# Altium PCB LPCB227R0.PcbDoc
Units mm, origin at the board's own origin, x right, y up, seen from the top; angles counter-clockwise.
Board outline 82 x 78 mm, 4 copper layers (Top Layer, Internal Plane 1, Mid-Layer 1, Bottom Layer); 47 components, 24 nets, 144 pads, 95 vias.
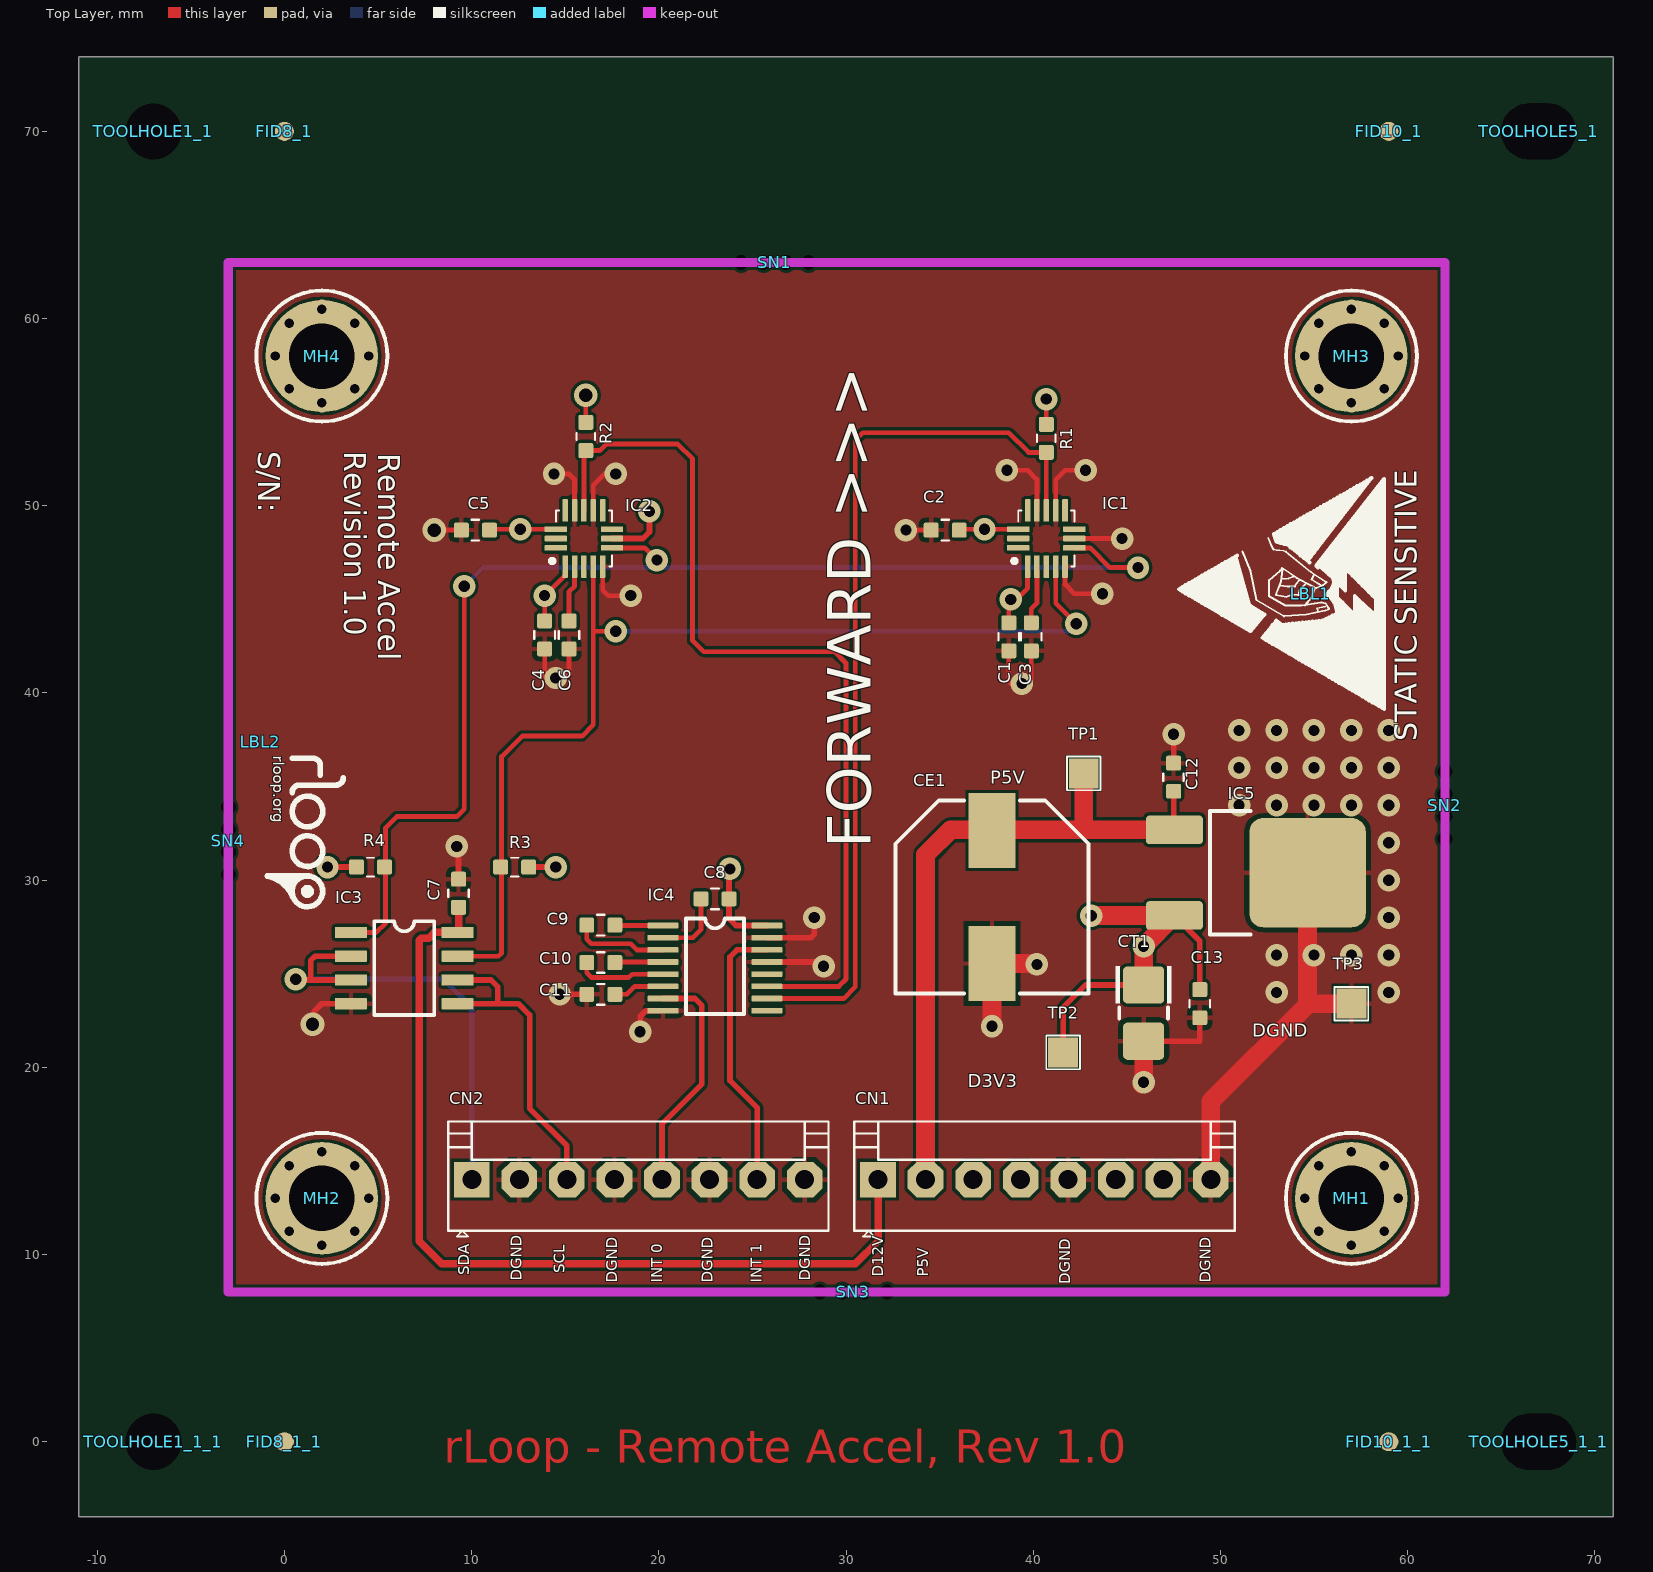
[diagram p0: Top Layer view]
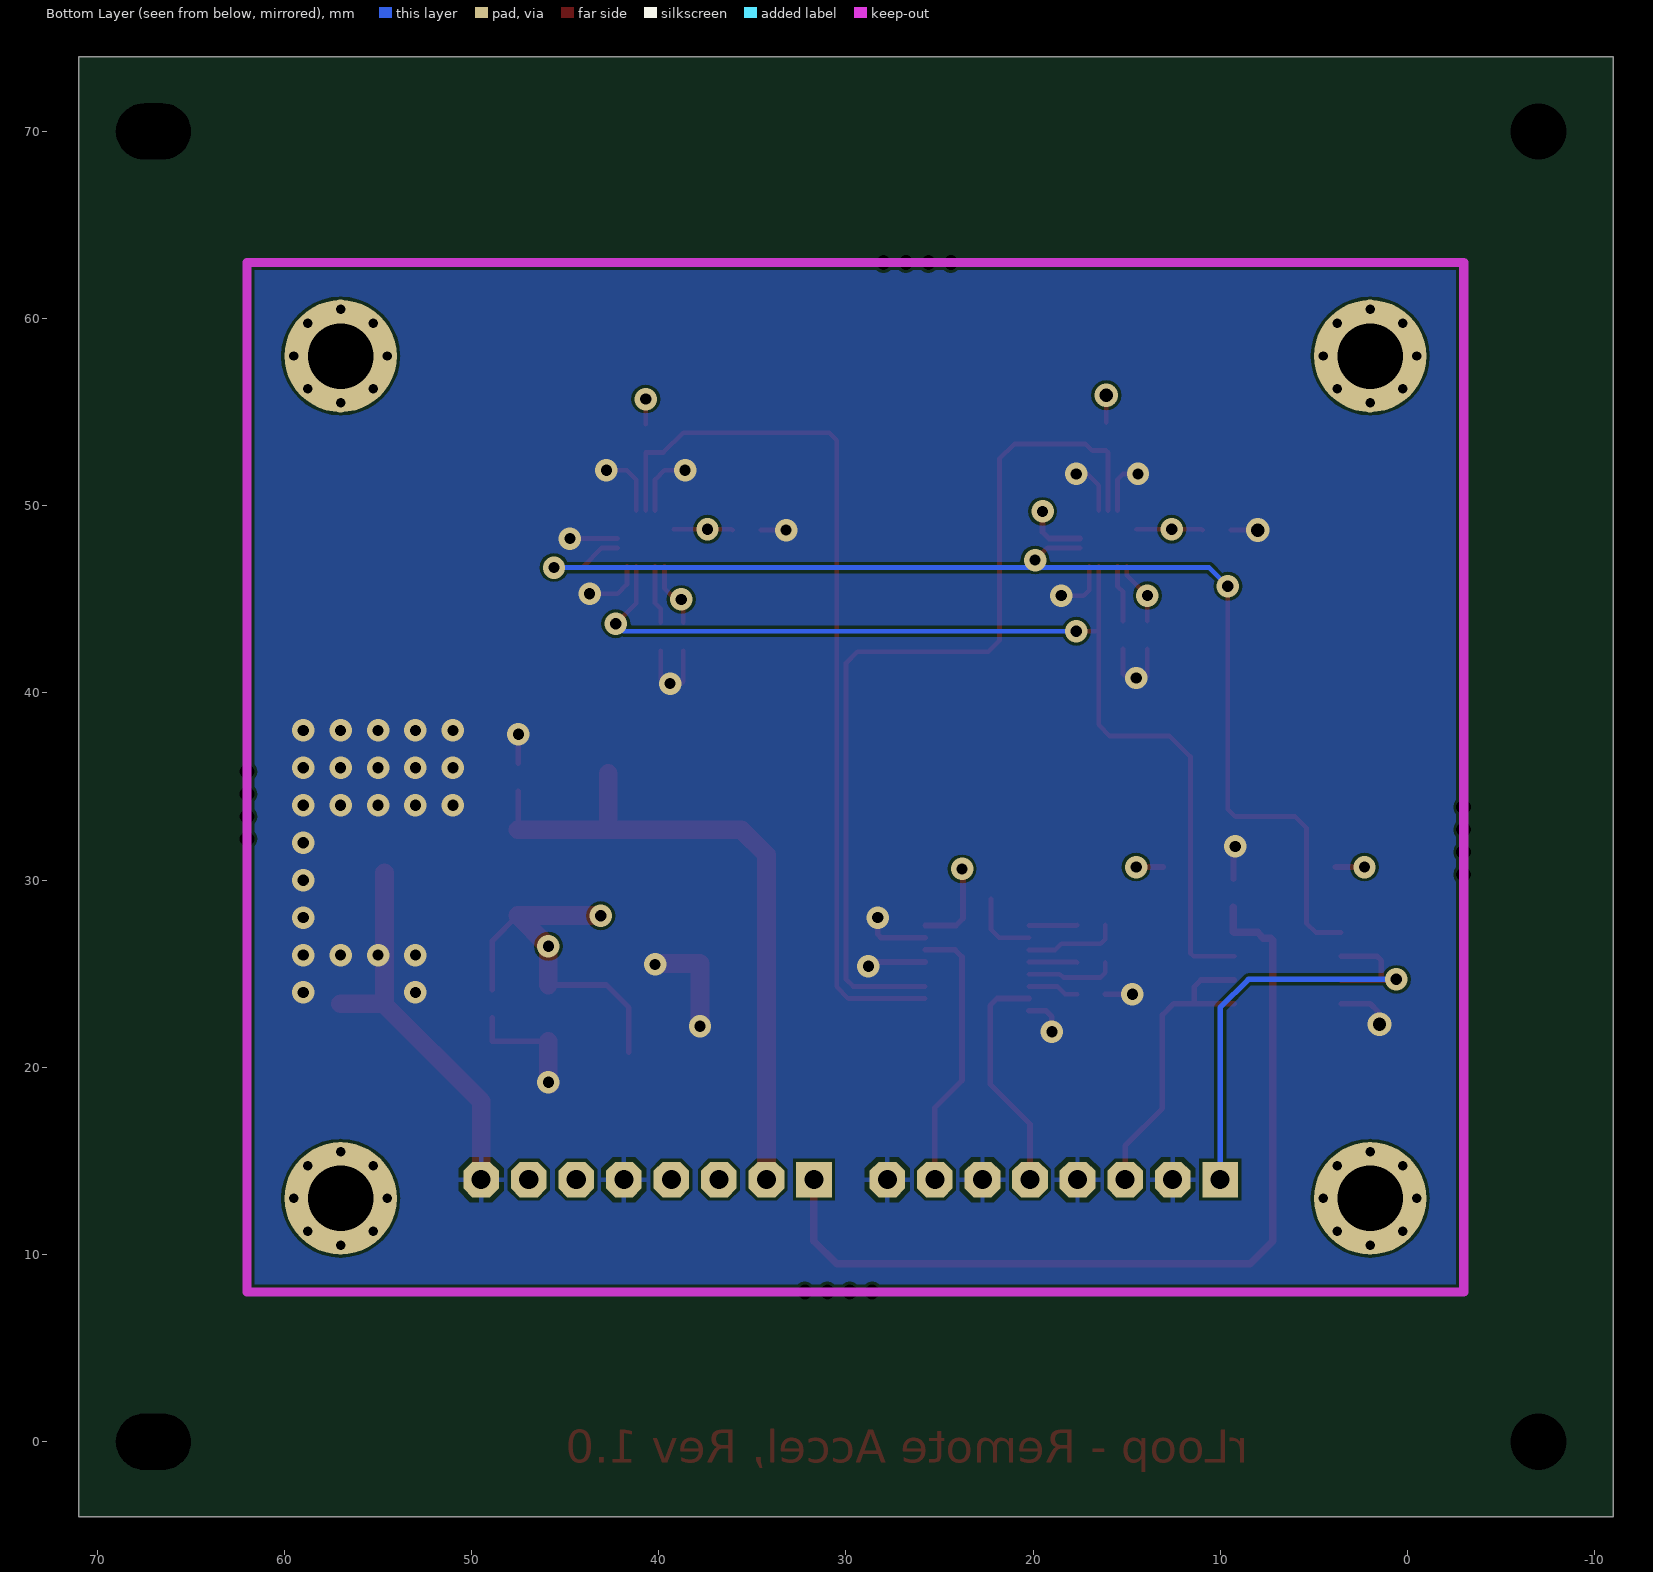
[diagram p1: Bottom Layer view, seen from below]
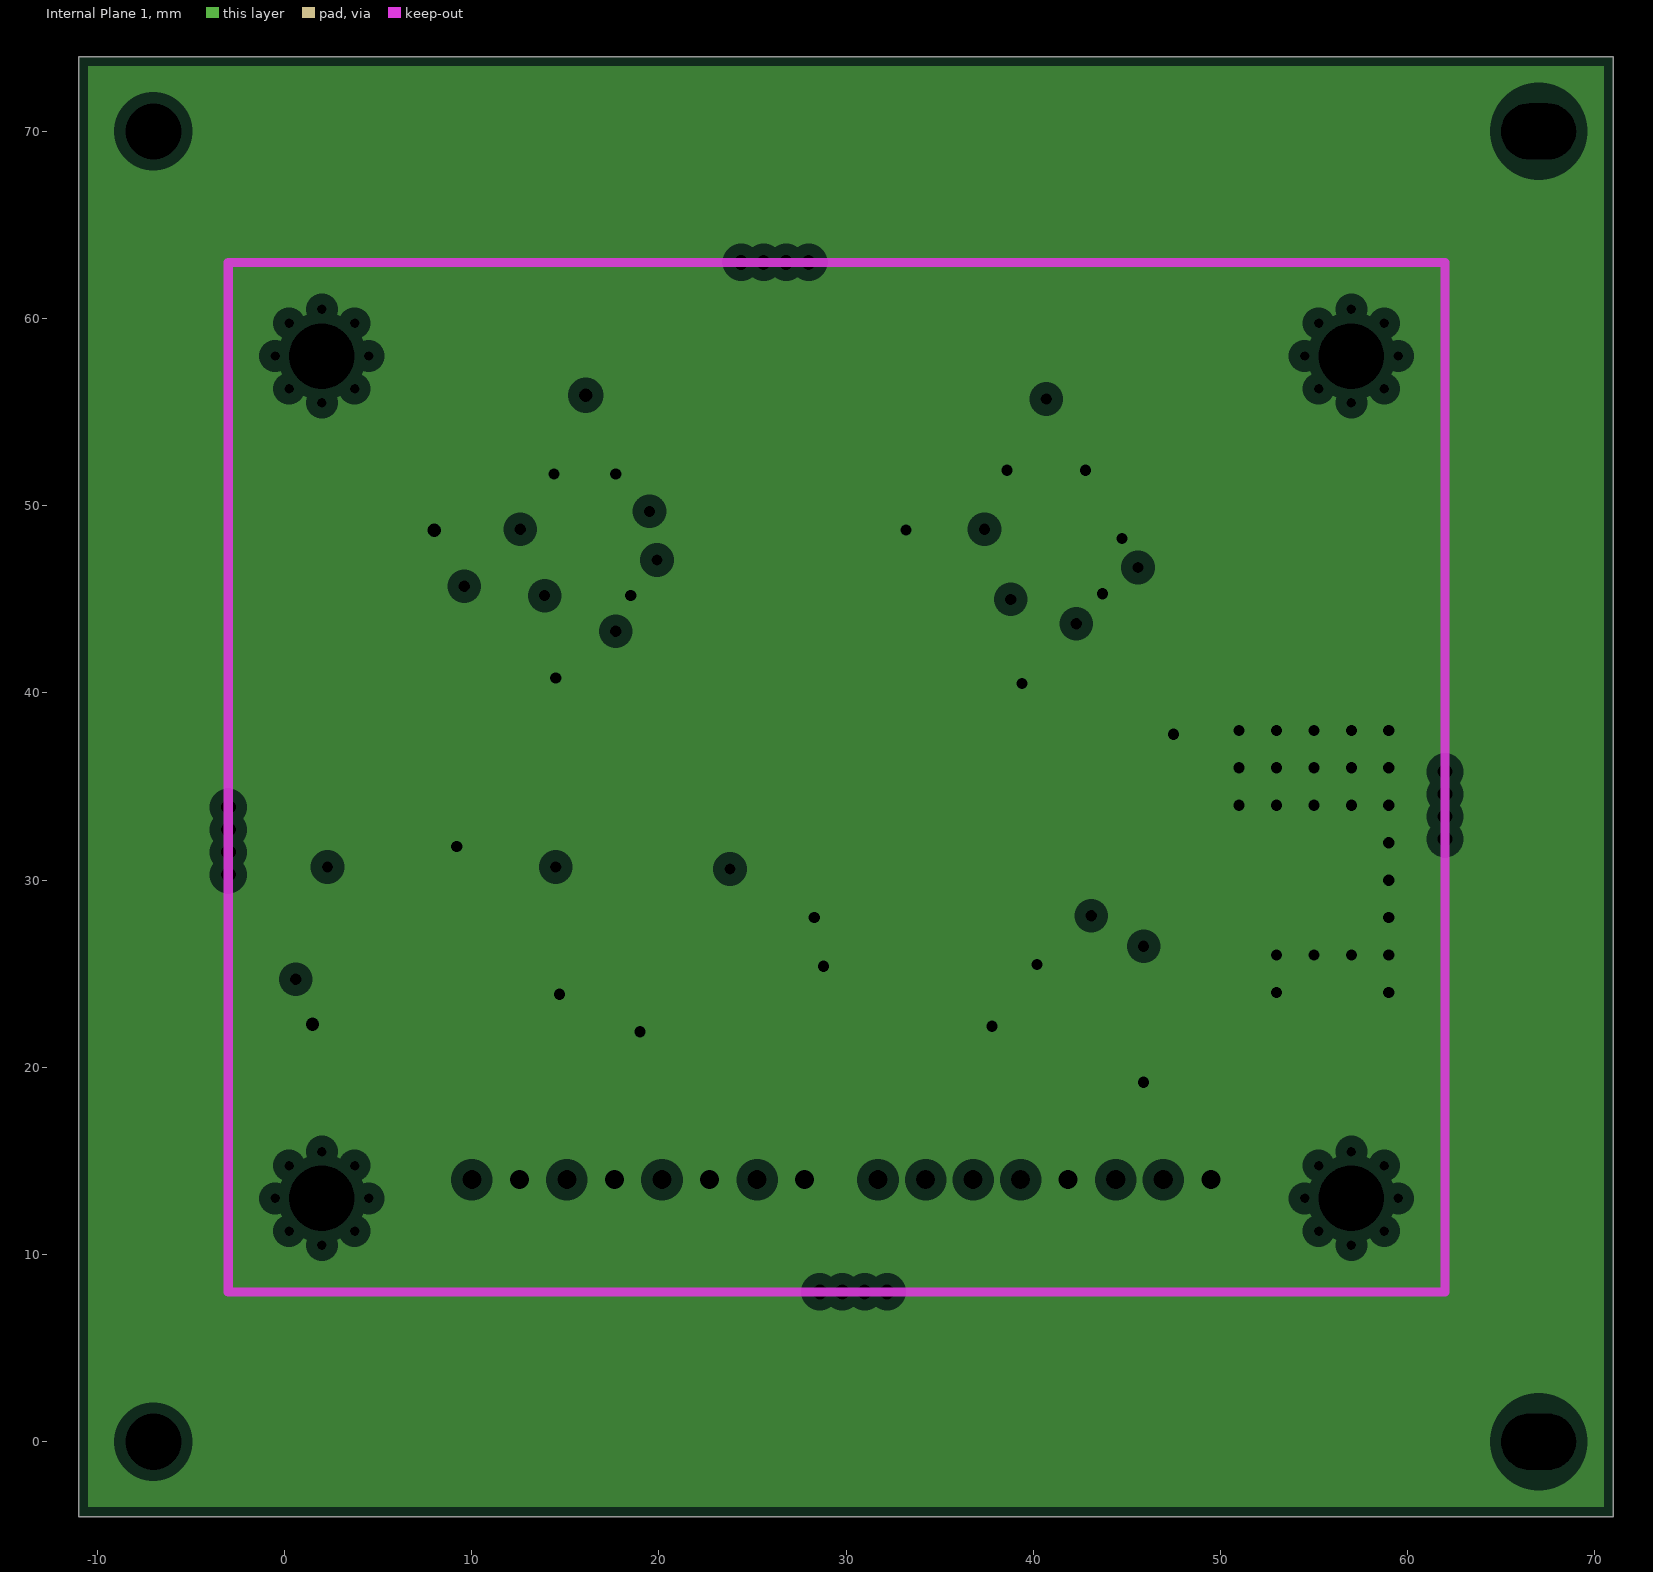
[diagram p2: Internal Plane 1, clearances drawn from the general rule]
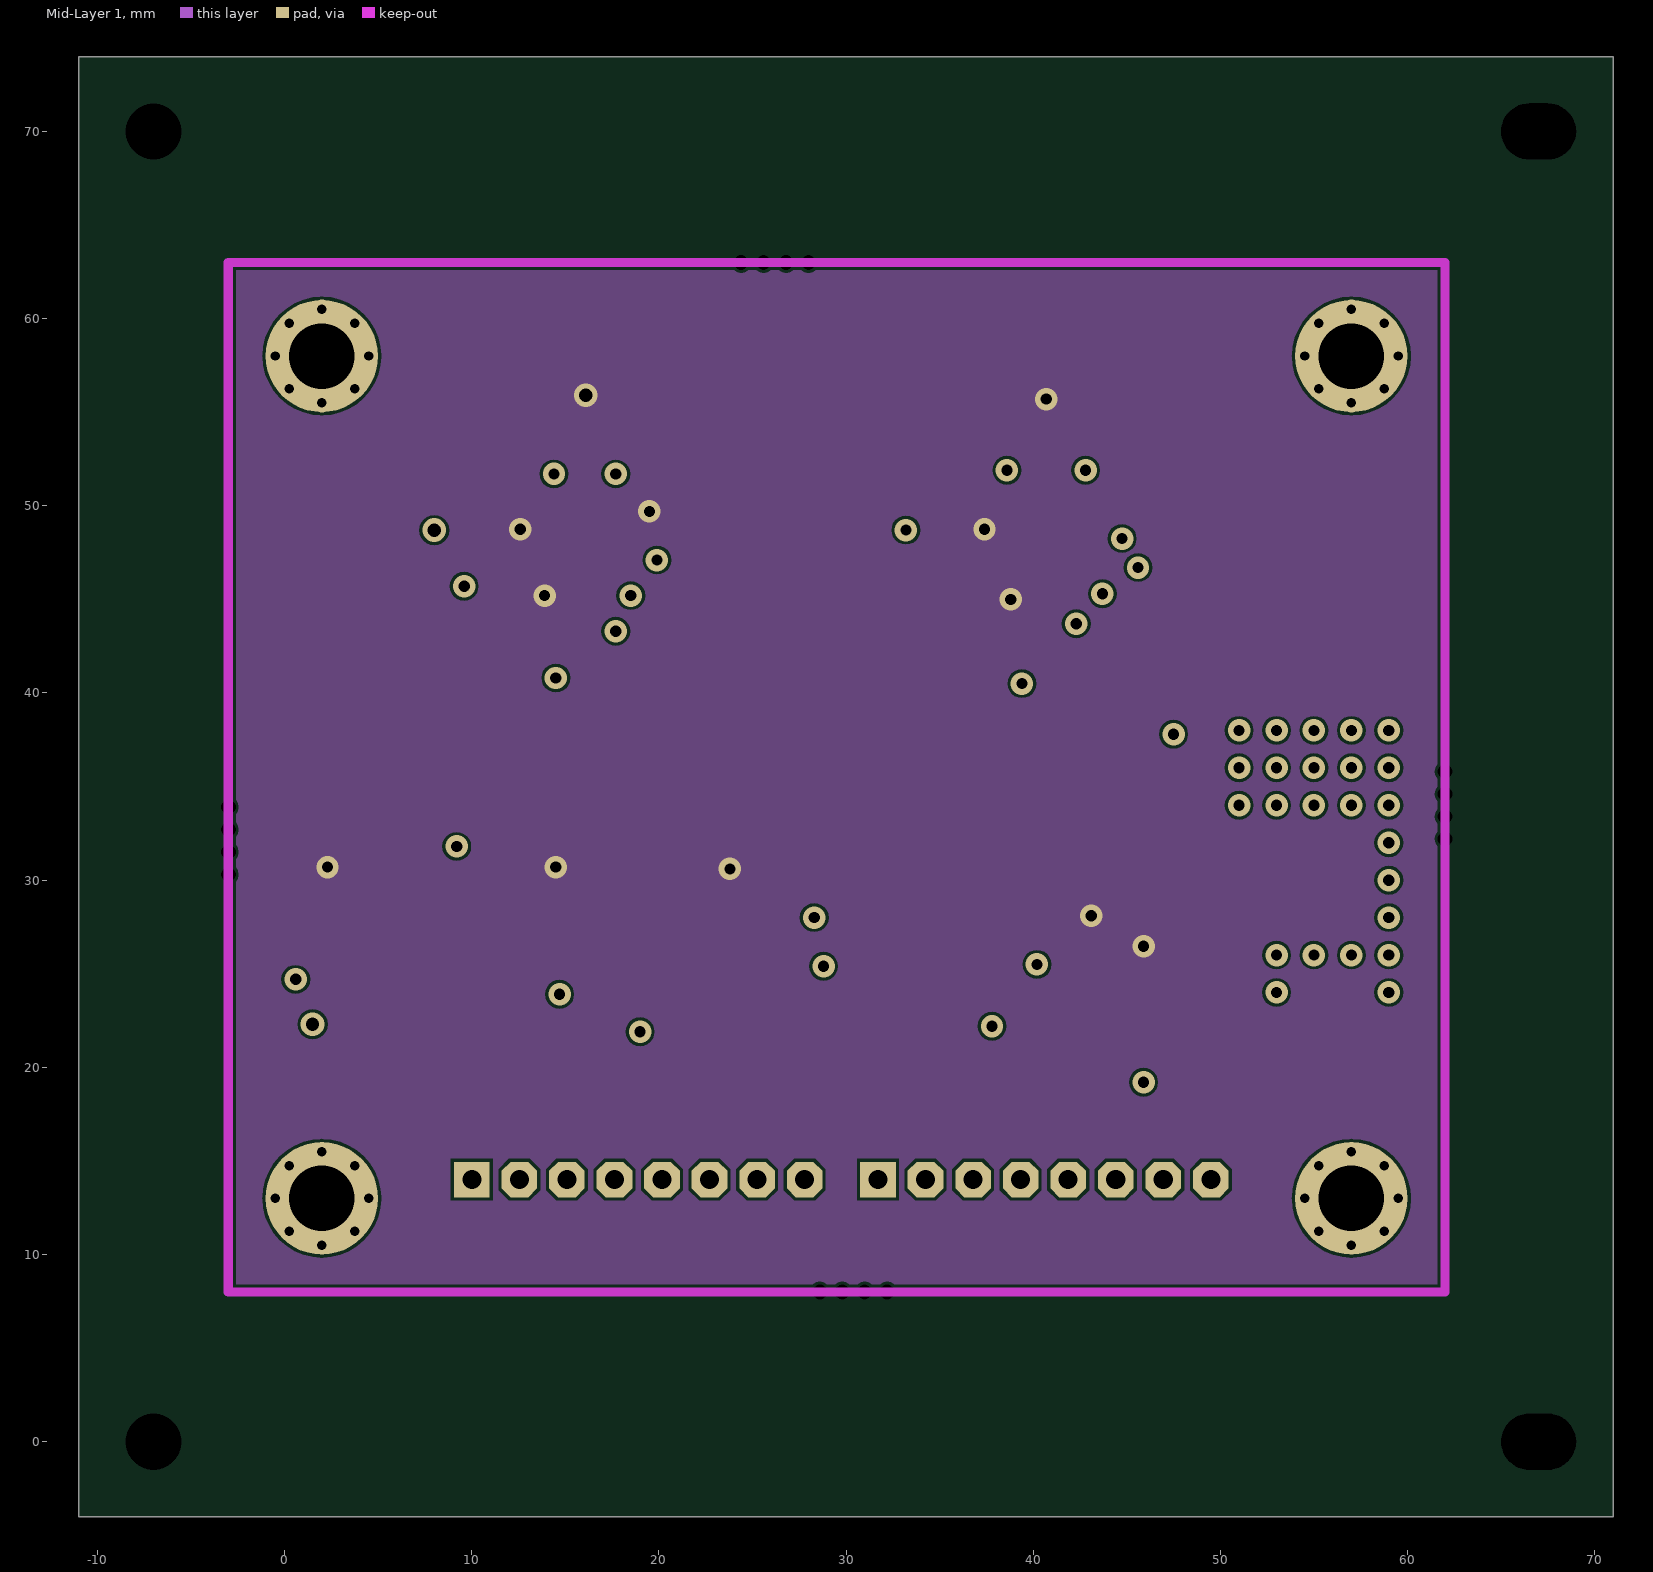
[diagram p3: Mid-Layer 1]

## Layer stack, top to bottom
Top Layer: signal copper 0.0356
Dielectric: core 0.32, FR-4, Dk 4.8
Internal Plane 1: plane copper 0.0356, net DGND
Dielectric: prepreg 0.32, FR-4, Dk 4.8
Mid-Layer 1: signal copper 0.0356
Dielectric: core 0.32, FR-4, Dk 4.8
Bottom Layer: signal copper 0.0356

## Board outline
-11,-4 -11,74 71,74 71,-4

## Design rules (kind name [scope] priority, off if disabled: settings)
Clearance [All] p1: gap=0.16
HoleSize [All] p1: absolutevalues=TRUE maxlimit=5 minlimit=0.025 maxpercent=80.000 minpercent=20.000
MinimumSolderMaskSliver [All] p1 off: minsoldermaskwidth=0.1
PlaneClearance [All] p1: clearance=0.6
PlaneConnect [All] p1: planeconnectstyle=Relief reliefexpansion=0.508 reliefentries=4 reliefconductorwidth=0.254 reliefairgap=0.254
PolygonConnect [IsVia] p1: connectstyle=Direct reliefconductorwidth=0.254 reliefentries=4 polygonreliefangle="90 Angle" airgapwidth=0.254
PolygonConnect PolygonConnect_1 [All] p2: connectstyle=Relief reliefconductorwidth=0.254 reliefentries=4 polygonreliefangle="90 Angle" airgapwidth=0.254
RoomDefinition "U_LPCB227 - POWER SUPPLY" [InComponentClass('U_LPCB227 - POWER SUPPLY')] p1: confinementstyle=ConfineIn formatcopy=TRUE lockcomponents=FALSE outline -79.611,-108.179 -28.811,-108.179 -28.811,-82.779 -79.611,-82.779
RoomDefinition "U_LPCB227 - I2C EXTENDER" [InComponentClass('U_LPCB227 - I2C EXTENDER')] p2: confinementstyle=ConfineIn formatcopy=TRUE lockcomponents=FALSE outline -79.611,-108.179 -28.811,-108.179 -28.811,-82.779 -79.611,-82.779
RoomDefinition "U_LPCB227 - ACCELS" [InComponentClass('U_LPCB227 - ACCELS')] p3: confinementstyle=ConfineIn formatcopy=TRUE lockcomponents=FALSE outline -79.611,-108.179 -28.811,-108.179 -28.811,-82.779 -79.611,-82.779
RoomDefinition "LPCB227 - OVERVIEW" [InComponentClass('LPCB227 - OVERVIEW')] p4: confinementstyle=ConfineIn formatcopy=TRUE lockcomponents=FALSE outline -79.611,-108.179 -28.811,-108.179 -28.811,-82.779 -79.611,-82.779
RoutingVias [All] p1: holewidth=0.6 width=1.2 viastyle="Through Hole" minholewidth=0.6 minwidth=1.2 maxholewidth=1 maxwidth=3
SilkToSilkClearance [All] p1 off: silktosilkclearance=0.254
SilkToSolderMaskClearance [IsPad] p1 off: minsilkscreentomaskgap=0.254 clearancetoexposedcopper=TRUE
SolderMaskExpansion [All] p1: expansion=0.102
Width [All] p1: maxlimit=2 minlimit=0.254 preferedwidth=0.254
22 further rules are at their usual default settings.

## Classes and differential pairs
component class "LPCB227 - OVERVIEW": CN1 CN2 LBL1 LBL2 MH1 MH2 MH3 MH4 SN1 SN2 SN3 SN4
component class "U_LPCB227 - ACCELS": C1 C2 C3 C4 C5 C6 IC1 IC2 R1 R2
component class "U_LPCB227 - I2C EXTENDER": C7 C8 C9 C10 C11 IC3 IC4 R3 R4
component class "U_LPCB227 - POWER SUPPLY": C12 C13 CE1 CT1 IC5 TP1 TP2 TP3

## Components (designator, comment, footprint, x,y, rotation, side; value= is the part's Value field where it differs from the comment)
C1 "100n / 50V / 10% / SMD 0603" LFP011__CC1608-0603-IPC7351_B 38.7,43 r270 top
C2 "100n / 50V / 10% / SMD 0603" LFP011__CC1608-0603-IPC7351_B 35.3,48.7 r180 top
C3 "100n / 50V / 10% / SMD 0603" LFP011__CC1608-0603-IPC7351_B 39.9,43 r270 top
C4 "100n / 50V / 10% / SMD 0603" LFP011__CC1608-0603-IPC7351_B 13.9,43.1 r270 top
C5 "100n / 50V / 10% / SMD 0603" LFP011__CC1608-0603-IPC7351_B 10.2,48.7 r180 top
C6 "100n / 50V / 10% / SMD 0603" LFP011__CC1608-0603-IPC7351_B 15.2,43.1 r270 top
C7 "100n / 50V / 10% / SMD 0603" LFP011__CC1608-0603-IPC7351_B 9.3,29.3 r90 top
C8 "100n / 50V / 10% / SMD 0603" LFP011__CC1608-0603-IPC7351_B 23,29 r180 top
C9 "100n / 50V / 10% / SMD 0603" LFP011__CC1608-0603-IPC7351_B 16.9,27.6 r180 top
C10 "100n / 50V / 10% / SMD 0603" LFP011__CC1608-0603-IPC7351_B 16.9,25.6 r180 top
C11 "100n / 50V / 10% / SMD 0603" LFP011__CC1608-0603-IPC7351_B 16.9,23.9 r180 top
C12 "100n / 50V / 10% / SMD 0603" LFP011__CC1608-0603-IPC7351_B 47.5,35.5 r90 top
C13 "100n / 50V / 10% / SMD 0603" LFP011__CC1608-0603-IPC7351_B 48.9,23.4 r270 top
CE1 "330uF / 35V / 20% / SMD 10x10" LFP041__NICHICON_WT_10X10 37.8,29.1 r270 top
CN1 "640456-8" 640456-8 40.6,14 r0 top locked
CN2 "640456-8" 640456-8 18.9,14 r0 top locked
CT1 "22uF / 16V / 10% / SMD TC3528" LFP018__TC3528 45.9,22.9 r270 top
FID8_1 "FIDUCIAL" FIDTOP 0,70 r0 top
FID8_1_1 "FIDUCIAL" FIDTOP 0,0 r0 top
FID10_1 "FIDUCIAL" FIDTOP 59,70 r0 top
FID10_1_1 "FIDUCIAL" FIDTOP 59,0 r0 top
IC1 "MMA8451QR1" LFP051__QFN16 40.7,48.25 r0 top
IC2 "MMA8451QR1" LFP051__QFN16 16,48.25 r0 top
IC3 "P82B96D" LFP097__SOIC150-8 6.4,25.3 r270 top
IC4 "MAX3232CPWR" LFP049__TSSOP-16 23,25.3 r270 top
IC5 "NCV4274DT33RKG" LFP019__369A-13 52.1,30.4 r270 top
LBL1 "STATIC LABEL" STATIC_LABEL 54.8,45.3 r90 top
LBL2 "RLOOP_LOGO" RLOOP_LOGO -1.3,37.4 r270 top
MH1 "MOUNTING_HOLE_3MM" MOUNTING_HOLE_3MM 57,13 r0 top locked
MH2 "MOUNTING_HOLE_3MM" MOUNTING_HOLE_3MM 2,13 r0 top locked
MH3 "MOUNTING_HOLE_3MM" MOUNTING_HOLE_3MM 57,58 r0 top locked
MH4 "MOUNTING_HOLE_3MM" MOUNTING_HOLE_3MM 2,58 r0 top locked
R1 "10K / 0.1W / 1% / SMD 0603" LFP020__CR1608-0603-IPC7351_B 40.7,53.6 r90 top
R2 "10K / 0.1W / 1% / SMD 0603" LFP020__CR1608-0603-IPC7351_B 16.1,53.7 r90 top
R3 "4.7K / 0.1W / 1% / SMD 0603" LFP020__CR1608-0603-IPC7351_B 12.3,30.7 r0 top
R4 "4.7K / 0.1W / 1% / SMD 0603" LFP020__CR1608-0603-IPC7351_B 4.6,30.7 r180 top
SN1 "PCB_SNAPOUT" SNAPOUT_NEW 28,63 r180 top locked
SN2 "PCB_SNAPOUT" SNAPOUT_NEW 62,32.2 r90 top
SN3 "PCB_SNAPOUT" SNAPOUT_NEW 32.2,8 r180 top locked
SN4 "PCB_SNAPOUT" SNAPOUT_NEW -3,30.3 r90 top locked
TOOLHOLE1_1 "Comment" TOOL-1#1 -7,70 r0 top
TOOLHOLE1_1_1 "Comment" TOOL-1#1 -7,0 r0 top
TOOLHOLE5_1 "Comment" TOOL-1#2 67,70 r0 top
TOOLHOLE5_1_1 "Comment" TOOL-1#2 67,0 r0 top
TP1 "SMD_TP" SMD-TP 42.7,35.7 r0 top
TP2 "SMD_TP" SMD-TP 41.6,20.8 r90 top
TP3 "SMD_TP" SMD-TP 57,23.4 r90 top

## Footprints (in the part's own frame and the unit in brackets; to place one, negate y for a bottom-side part, rotate by r counter-clockwise, add the part's x,y. Pads: shape width x height; smd on the part's side, far side on the other; paste and mask are expansions set on the pad)
640456-8 [mm] "Connector, Male Header, 8 Way"
  rect 1.905x1.905 hole 1.02: 1(-8.89,0)
  oct 1.905x1.905 hole 1.02: 2(-6.35,0) 3(-3.81,0) 4(-1.27,0) 5(1.27,0) 6(3.81,0) 7(6.35,0) 8(8.89,0)
  silkscreen extent -10.15,-3.04 10.17,3.1
FIDTOP [mil]
  round 40 smd mask+39.37: 1(0,0)
LFP011__CC1608-0603-IPC7351_B [mm]
  rrect25% 0.8x0.8 smd: 1(-0.75,0) 2(0.75,0)
  silkscreen extent -0.2,-0.55 0.2,0.55
LFP018__TC3528 [mm]
  rrect25% 2x2.2 smd: 1(-1.5,0) 2(1.5,0)
  silkscreen extent -2.51,-1.5 0.3,1.5
LFP019__369A-13 [mil]
  rrect25% 60x120 smd: 1(-90,-179.49) 3(90,-179.49)
  rrect25% 230x245 smd paste-196.85: 4(0,100.75)
  silkscreen extent -130,-104 130,-19
LFP020__CR1608-0603-IPC7351_B [mm]
  rrect25% 0.8x0.8 smd: 1(-0.75,0) 2(0.75,0)
  silkscreen extent -0.2,-0.5 0.2,0.5
LFP041__NICHICON_WT_10X10 [mm]
  rect 4x2.5 smd: 1(-3.55,0) 2(3.55,0)
  silkscreen extent -5.15,-5.15 5.15,5.15
LFP049__TSSOP-16 [mm] "Copied from 984E-02"
  rrect25% 0.3x1.65 smd paste-0.03: 1(-2.275,-2.775) 2(-1.625,-2.775) 3(-0.975,-2.775) 4(-0.325,-2.775) 5(0.325,-2.775) 6(0.975,-2.775) 7(1.625,-2.775) 8(2.275,-2.775) 9(2.275,2.775) 10(1.625,2.775) 11(0.975,2.775) 12(0.325,2.775) 13(-0.325,2.775) 14(-0.975,2.775) 15(-1.625,2.775) 16(-2.275,2.775)
  silkscreen extent -2.65,-1.55 2.45,1.55
LFP051__QFN16 [mm]
  rrect25% 0.3x1.2 smd paste-0.05: 1(-1,-1.5) 2(-0.5,-1.5) 3(0,-1.5) 4(0.5,-1.5) 5(1,-1.5) 9(1,1.5) 10(0.5,1.5) 11(0,1.5) 12(-0.5,1.5) 13(-1,1.5)
  rrect25% 1.2x0.3 smd paste-0.05: 6(1.5,-0.5) 7(1.5,0) 8(1.5,0.5) 14(-1.5,0.5) 15(-1.5,0) 16(-1.5,-0.5)
  silkscreen extent -1.8,-1.5 1.5,1.5
LFP097__SOIC150-8 [mm] "Small Outline, Plastic, Narrow; 8 Leads; Body Width 3.8 mm; Pitch 1.27 mm"
  rrect10% 0.6x1.7 smd paste-0.05: 1(-1.905,-2.85) 2(-0.635,-2.85) 3(0.635,-2.85) 4(1.905,-2.85) 5(1.905,2.85) 6(0.635,2.85) 7(-0.635,2.85) 8(-1.905,2.85)
  silkscreen extent -2.5,-1.6 2.5,1.6
MOUNTING_HOLE_3MM [mm] "Non-plated mounting hole for 3mm screw"
  round 6 hole 3.5 mask+0.051: MOUNT(0,0)
  silkscreen extent -3.5,-3.5 3.5,3.5
RLOOP_LOGO [mm]
  silkscreen extent 0.89,0.39 8.82,4.45
SMD-TP [mm]
  rect 1.6x1.6 smd paste-2: 1(0,0)
  silkscreen extent -0.9,-0.9 0.9,0.9
SNAPOUT_NEW [mm]
  round 0.4 hole 0.8 unplated: 0(0,0) 0(1.2,0) 0(2.4,0) 0(3.6,0)
STATIC_LABEL [mm]
  silkscreen extent -6.16,-3.95 6.18,7.02
TOOL-1#1 [mm]
  round 2.54 hole 3 unplated: TOOL(0,0)
TOOL-1#2 [mm]
  round 0.076 hole 3 slot 4 at 0 deg unplated: TOOL1(0,0)

## Part data
C1 C2 C3 C4 C5 C6 C7 C12 C13: "Capacitor, Ceramic Chip, 100nF (0.1uF), 50V, 5%, SMD 0603 [LCA016]"
C8 C9 C10 C11: "Capacitor, Ceramic Chip, 100nF, 50V, 10%, SMD 0603"
CE1: "Capacitor, Aluminum Electrolytic, 330uF, 35V, 20%, SMD (10mm x 10mm) [LCA071]"
CN1 CN2: "Connector, Male Header, 8 Way"
CT1: "Capacitor, Tantalum, 22uF, 16V, 10%, SMD TC3528 (BCASE) [LCA039]"
IC1 IC2: "IC, Accelerometer, 3-Axis, 3.3V, I2C, SMD QFN16 [LIC393]"
IC3: "IC, I2C Line Driver [LIC571]"
IC4: "IC, RS232 Line Driver, 3.3V, SMD TSSOP16"
IC5: "IC, Voltage Regulator, 400mA, 3.3V LDO, SMD DPAK [LIC233]"
MH1 MH2 MH3 MH4: "3MM Mouting Hole"
R1 R2: "Resistor, Ceramic Chip, 10K, 0.1W, 1%, SMD 0603 [LRE030]"
R3 R4: "Resistor, Ceramic Chip, 4K7, 0.1W, 1%, SMD 0603 [LRE058]"
TP1 TP2 TP3: "SMD Test Point"

## Via types
v1: diameter 1.2, hole 0.6, Top Layer to Bottom Layer, 60 vias
v2: diameter 1.016, hole 0.5, Top Layer to Bottom Layer, tented both sides, 32 vias
v3: diameter 1.27, hole 0.711, Top Layer to Bottom Layer, 3 vias

## Nets (pads, with @x,y where several pads share a name; then routed paths per layer and width w, separated by ;. In a path a pad name is that pad's centre, name@x,y a point inside that pad or via, vN(x,y) a via of type N, cw(c..) or ccw(c..) an arc to the next point about the centre after c; other vN are vias at no path point)
D3V3: C1.1 C2.1 C4.1 C5.1 C8.1 C13.1 CT1.1 IC1.1 IC1.14 IC2.1 IC2.7 IC2.14 IC4.16 IC5.3 R1.2 R2.2 R3.2 R4.2 TP2.1 | length 48
  Top Layer w0.254: C5.1 11,48.75 IC2.14 ; C4.1 v1(13.9,45.2) 15,46.3 IC2.1 ; R2.2 v3(16.1,55.9) ; C2.1 36.1,48.75 IC1.14 ; C1.1 38.7,44.6 39.7,45.6 IC1.1 ; R1.2 v1(40.7,55.7)
  Top Layer w0.3: v1(2.3,30.7) R4.2 ; R3.2 v1(14.5,30.7) ; IC2.7 19.15,48.25 19.5,48.6 v1(19.5,49.7) ; v1(23.8,30.6) 23.75,30.55 C8.1 23.75,27.95 24.125,27.575 IC4.16 ; TP2.1 41.6,23.2 42.8,24.4 CT1.1 ; IC5.3 48.9,26.755 C13.1
  Top Layer w1: v1(43.1,28.1) 43.114,28.114 IC5.3 v1(45.9,26.473) CT1.1
  other v1: 38.8,45 12.6,48.75 37.4,48.75
D12V: C7.1 CN1.1 IC3.8 | length 48.5
  Top Layer w0.4: C7.1 9.3,27.255 IC3.8 8.005,27.205 7.7,26.9 7.3,26.9 7.2,26.8 7.2,10.7 8.4,9.5 30.5,9.5 31.71,10.71 CN1.1
DGND: C1.2 C2.2 C3.2 C4.2 C5.2 C6.2 C7.2 C11.2 C12.2 C13.2 CE1.2 CN1.5 CN1.8 CN2.2 CN2.4 CN2.6 CN2.8 CT1.2 IC1.5 IC1.7 IC1.10 IC1.12 IC2.5 IC2.10 IC2.12 IC3.4 IC4.8 IC4.13 IC4.15 IC5.4 TP3.1 | length 82.5
  Top Layer w0.254: v3(8,48.7) C5.2 ; C4.2 13.9,40.9 14,40.8 15,40.8 15.2,41 C6.2 ; v1(14.4,51.7) 15.2,51.7 15.5,51.4 IC2.12 ; IC2.10 16.5,51.1 17.1,51.7 v1(17.7,51.7) ; IC2.5 17,45.5 17.3,45.2 v1(18.5,45.2) ; v1(33.2,48.7) C2.2 ; v1(38.6,51.9) 39.7,51.9 40.2,51.4 IC1.12 ; C1.2 38.7,40.6 38.8,40.5 39.7,40.5 39.9,40.7 C3.2 ; IC1.10 41.2,51.4 41.7,51.9 v1(42.8,51.9) ; IC1.5 41.7,45.8 42.2,45.3 v1(43.7,45.3) ; IC1.7 v1(44.75,48.25) v1@44.8,48.3
  Top Layer w0.3: v3(1.5,22.3) 1.6,22.3 1.6,23 1.995,23.395 IC3.4 ; v1(9.2,31.8) 9.3,31.7 C7.2 ; v1(14.7,23.9) C11.2 ; v1(19,21.9) 19,22.7 19.325,23.025 IC4.8 ; IC4.13 28.575,25.625 v1(28.8,25.4) ; IC4.15 28.125,26.925 28.3,27.1 v1(28.3,28) ; CT1.2 48.9,21.4 C13.2 ; C12.2 v1(47.5,37.8)
  Top Layer w1: v1(37.8,22.2) CE1.2 40.15,25.55 v1(40.2,25.5) ; v1@45.8,19.1 v1(45.9,19.2) CT1.2 ; CN1.8 49.49,18.19 54.659,23.359 ; IC5.4 54.659,23.359 ; TP3.1 54.7,23.4 54.659,23.359
  other v1: 53,24 59,24 53,26 55,26 57,26 59,26 59,28 59,30 59,32 51,34 53,34 55,34 57,34 59,34 51,36 53,36 55,36 57,36 59,36 51,38 53,38 55,38 57,38 59,38 39.4,40.5 14.5,40.8
I2C_SCL: IC1.4 IC2.4 IC3.7 R3.1 | length 56.4
  Top Layer w0.254: IC3.7 11.435,25.935 11.6,26.1 11.6,36.6 12.7,37.7 15.9,37.7 16.5,38.3 16.5,43.3 ; IC2.4 16.5,43.3 ; v1(17.7,43.3) 16.5,43.3 ; IC1.4 41.2,44.8 v1(42.3,43.7)
  Bottom Layer w0.254: v1(17.7,43.3) 41.9,43.3 v1(42.3,43.7)
I2C_SDA: IC1.6 IC2.6 IC3.1 R4.1 | length 67
  Top Layer w0.254: IC3.1 4.905,27.205 5.4,27.7 5.4,32.8 6,33.4 9.2,33.4 9.6,33.8 v1(9.6,45.7) ; IC2.6 19.25,47.75 v1(19.9,47.1) ; IC1.6 43.05,47.75 44.1,46.7 v1(45.6,46.7)
  Bottom Layer w0.254: v1(9.6,45.7) 10.6,46.7 v1@19.9,46.7 ; v1(19.9,47.1) v1@19.9,46.7 ; v1(45.6,46.7) v1@19.9,46.7
ISO1: MH1.MOUNT
  other v2: 57,10.5 55.25,11.25 58.75,11.25 54.5,13 59.5,13 55.25,14.75 58.75,14.75 57,15.5
ISO2: MH2.MOUNT
  other v2: 2,10.5 0.25,11.25 3.75,11.25 -0.5,13 4.5,13 0.25,14.75 3.75,14.75 2,15.5
ISO3: MH3.MOUNT
  other v2: 57,55.5 55.25,56.25 58.75,56.25 54.5,58 59.5,58 55.25,59.75 58.75,59.75 57,60.5
ISO4: MH4.MOUNT
  other v2: 2,55.5 0.25,56.25 3.75,56.25 -0.5,58 4.5,58 0.25,59.75 3.75,59.75 2,60.5
NetC3_1: C3.1 IC1.2 | length 3.1
  Top Layer w0.254: C3.1 39.9,44.5 40.2,44.8 IC1.2
NetC6_1: C6.1 IC2.2 | length 3
  Top Layer w0.254: C6.1 15.2,45.4 15.5,45.7 IC2.2
NetC8_2: C8.2 IC4.2 | length 3.9
  Top Layer w0.254: IC4.2 21.825,26.925 22.25,27.35 C8.2
NetC9_1: C9.1 IC4.1 | length 2.6
  Top Layer w0.254: C9.1 17.675,27.575 IC4.1
NetC9_2: C9.2 IC4.3 | length 5.1
  Top Layer w0.254: C9.2 16.15,26.85 16.4,26.6 18.5,26.6 18.825,26.275 IC4.3
NetC10_1: C10.1 IC4.4 | length 2.6
  Top Layer w0.254: C10.1 17.675,25.625 IC4.4
NetC10_2: C10.2 IC4.5 | length 4.8
  Top Layer w0.254: C10.2 16.15,25.05 16.4,24.8 18.4,24.8 18.575,24.975 IC4.5
NetC11_1: C11.1 IC4.6 | length 2.8
  Top Layer w0.254: C11.1 18.3,23.9 18.725,24.325 IC4.6
NetCN2_1: CN2.1 IC3.2 IC3.3 | length 25.5
  Top Layer w0.3: v1(0.6,24.7) 0.635,24.665 1.4,24.665 ; IC3.3 1.4,24.665 ; IC3.2 1.635,25.935 1.4,25.7 1.4,24.665
  Bottom Layer w0.3: v1(0.6,24.7) 8.5,24.7 10.01,23.19 CN2.1
NetCN2_3: CN2.3 IC3.5 IC3.6 | length 16.9
  Top Layer w0.3: IC3.5 11.4,23.395 ; IC3.6 11.035,24.665 11.4,24.3 11.4,23.395 ; CN2.3 15.09,15.81 13.1,17.8 13.1,22.8 12.505,23.395 11.4,23.395
NetCN2_5: CN2.5 IC4.7 | length 12.4
  Top Layer w0.3: CN2.5 20.17,16.97 22.3,19.1 22.3,23.3 21.925,23.675 IC4.7
NetCN2_7: CN2.7 IC4.14 | length 14.6
  Top Layer w0.3: CN2.7 25.25,17.85 23.8,19.3 23.8,25.9 24.175,26.275 IC4.14
NetIC1_11: IC1.11 IC4.10 R1.1 | length 48.1
  Top Layer w0.254: IC4.10 29.875,23.675 30.5,24.3 30.5,53.5 30.9,53.9 38.7,53.9 39.75,52.85 R1.1 IC1.11
NetIC2_11: IC2.11 IC4.11 R2.1 | length 49.1
  Top Layer w0.254: IC2.11 16,52.85 R2.1 16.85,52.95 17.2,53.3 21,53.3 21.8,52.5 21.8,42.8 22.4,42.2 29.4,42.2 30,41.6 30,24.7 29.625,24.325 IC4.11
P5V: C12.1 CE1.1 CN1.2 IC5.1 TP1.1 | length 36.3
  Top Layer w0.3: C12.1 47.5,32.727 IC5.1
  Top Layer w1: CN1.2 34.25,31.35 35.586,32.686 42.7,32.686 ; TP1.1 42.7,32.686 ; IC5.1 42.7,32.686
pads on no net: CN1.3 CN1.4 CN1.6 CN1.7 FID8_1.1 FID8_1_1.1 FID10_1.1 FID10_1_1.1 IC1.3 IC1.8 IC1.9 IC1.13 IC1.15 IC1.16 IC2.3 IC2.8 IC2.9 IC2.13 IC2.15 IC2.16 IC4.9 IC4.12 SN1.0 SN2.0 SN3.0 SN4.0 TOOLHOLE1_1.TOOL TOOLHOLE1_1_1.TOOL TOOLHOLE5_1.TOOL1 TOOLHOLE5_1_1.TOOL1

## Polygon pours and split planes (outlines as drawn)
D3V3 on Mid-Layer 1 "Bottom Layer-No Net" (solid, remove dead copper, pour order 6): -3,63 62,63 62,8 -3,8
DGND on Top Layer "Bottom Layer-No Net" (solid, remove dead copper, pour order 5): -3,63 62,63 62,8 -3,8
DGND on Bottom Layer "Bottom Layer-No Net" (solid, remove dead copper, pour order 4): -3,63 62,63 62,8 -3,8
DGND on Internal Plane 1 (split plane): 70.49,-3.49 -10.49,-3.49 -10.49,73.49 70.49,73.49

## Keep-outs
Keep-Out Layer:
  lines w0.5: -3,8 -3,63 62,63 62,8 -3,8

## Other copper
Top Layer:
  text "rLoop - Remote Accel, Rev 1.0" at 8.5,-1.7 h3

## Silkscreen, mask and mechanical layers (free items; w line width, h text height)
Top Overlay:
  text "S/N:" at -1.8,52.9 h2 r270
  text "Revision 1.0" at 2.8,52.9 h2 r270
  text "Remote Accel" at 4.6,52.8 h2 r270
  text "P5V" at 37.7,34.9 h1.2
  text "FORWARD >>>" at 32.1,31.7 h4 r90
  text "DGND" at 51.7,21.4 h1.2
  text "D3V3" at 36.5,18.7 h1.2
  text "SCL" at 15.2,9 h1 r90
  text "SDA" at 10.1,8.9 h1 r90
  text "D12V" at 32.2,8.8 h1 r90
  text "P5V" at 34.6,8.8 h1 r90
  text "DGND" at 12.9,8.6 h1 r90
  text "DGND" at 28.3,8.6 h1 r90
  text "DGND" at 18,8.5 h1 r90
  text "INT 0" at 20.4,8.5 h1 r90
  text "DGND" at 23.1,8.5 h1 r90
  text "INT 1" at 25.7,8.5 h1 r90
  text "DGND" at 49.7,8.5 h1 r90
  text "DGND" at 42.2,8.4 h1 r90
Mechanical 1:
  lines w0.1: -11,-4 71,-4 71,74 -11,74 -11,-4
  lines w0.127: -3,8 62,8 62,63 -3,63 -3,8
Mechanical 3:
  lines w2.4: -4.2,28.8 -4.2,6.8 26.8,6.8 ; -4.2,35.8 -4.2,64.2 22.8,64.2 ; 29,64.2 63.2,64.2 63.2,37.8 ; 33.8,6.8 63.2,6.8 63.2,30.8

## Text inside footprints (layer, text, board x,y; h text height)
LBL1: Top Overlay "STATIC SENSITIVE" at 60.896,37.426 h2 r90
LBL2: Top Overlay "rloop.org" at -0.8,36.65 h1 r270